# EAGLE board pwm_nmos_simple.brd (EAGLE 6.5.0)
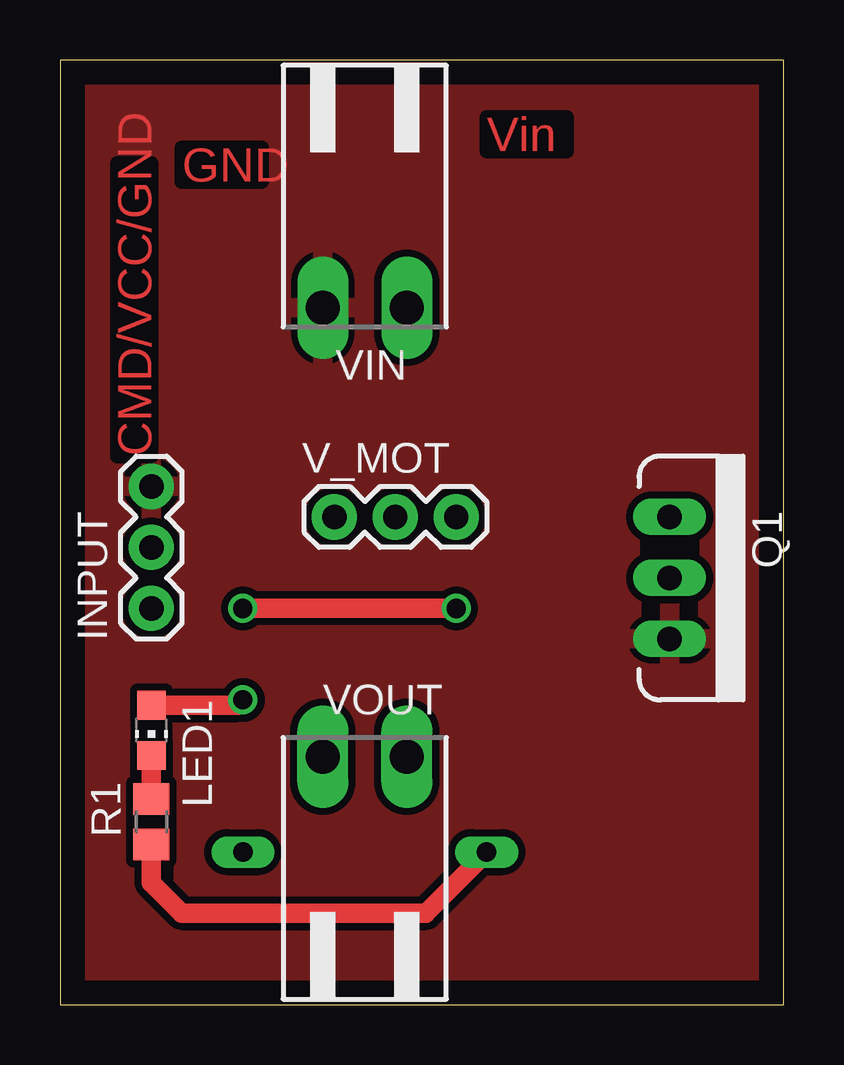
[diagram p0: board, top side]
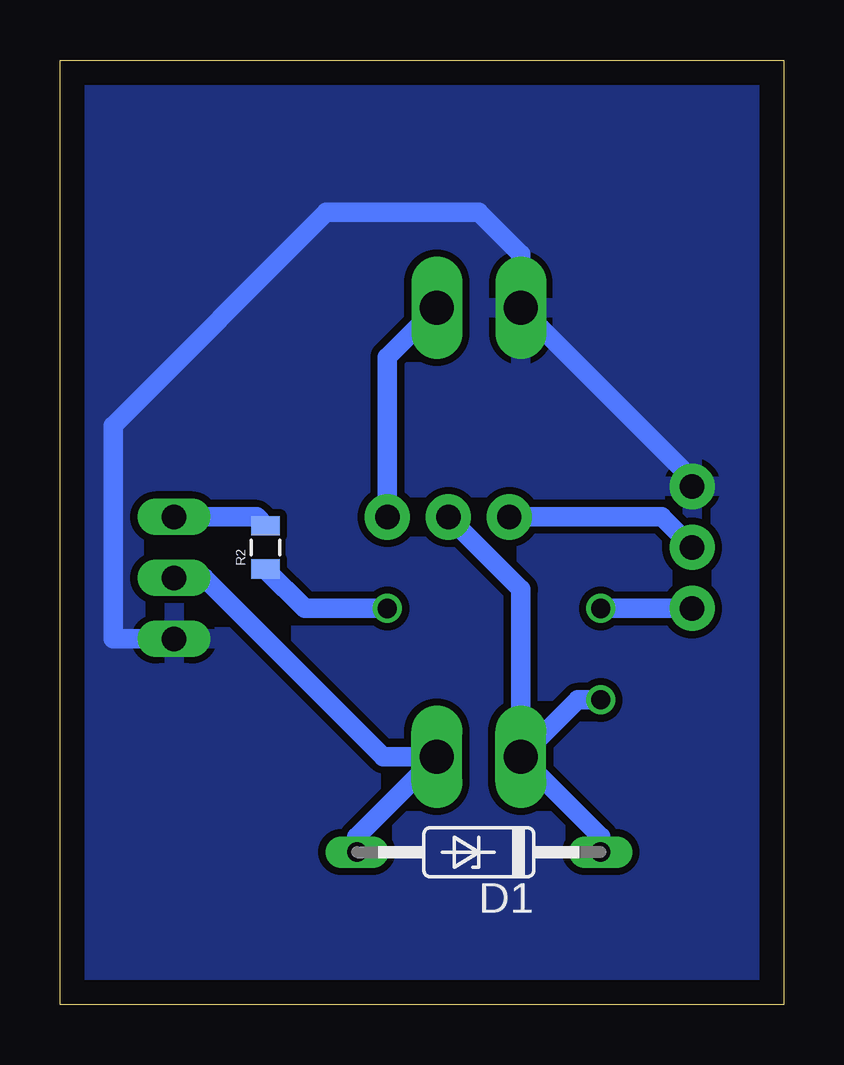
[diagram p1: board, bottom side, seen from below]

Size 30.15 x 39.36 mm. Coordinates in mm from the lower left corner, seen from the top.
Outline: 0,0 30.15,0 30.15,39.36 0,39.36 0,0
Copper layers (1*16): Top 0.035mm / dielectric 1.5mm / Bottom 0.035mm
Design rules "default": minimum track width 10mil, minimum drill 24mil, track to track 8mil, track to pad 8mil, pad to pad 8mil, via to via 8mil, smd to smd 8mil, copper to edge 40mil, drill to drill 8mil, minimum pad ring 10mil, minimum via ring 8mil, stop-mask expansion 4mil, vias tented up to drill 0mil, thermal gap 10mil
Net classes: 0 default: width 1.016 mm, drill 0.6 mm, clearance 0.3 mm

## Footprints (pad centres in the part's own frame; a part is rotated, then mirrored left to right if it is on the bottom)
DO35Z10 = drill 0.813 long: A 5.08,0; C -5.08,0
1X03 = drill 1.016 pad 1.88: 1 0,0; 2 2.54,0; 3 5.08,0
CHIP-LED0805 = smd 1.2 x 1.2: A 0,-1.05; C 0,1.05
TO220V = drill 1.016 long: 1 -2.54,0; 2 0,0; 3 2.54,0
R0805 = smd 1.3 x 1.5: 1 -0.95,0; 2 0.95,0
0805 = smd 0.8 x 1.2: 1 -0.9,0; 2 0.9,0
90-2 = drill 1.422 long: 1 -1.75,5.25; 2 1.75,5.25

## Placement (x,y rotation side)
D1  1N821  [DO35Z10]  12.7,6.35 180 bottom
INPUT  [1X03]  3.81,16.51 90 top
LED1  [CHIP-LED0805]  3.81,11.43 180 top
Q1  MOSFET-NCHANNELFQP30N06L  [TO220V]  25.4,17.78 270 top
R1  [R0805]  3.81,7.62 90 top
R2  10ohm  [0805]  21.59,19.05 90 bottom
V_MOT  [1X03]  11.43,20.32 0 top
VIN  [90-2]  12.7,34.29 180 top
VOUT  [90-2]  12.7,5.08 0 top

## Library data of the parts
D1 = diode
INPUT = SparkFun-Electromechanical
LED1 = led
Q1 = SparkFun-DiscreteSemi; PROD_ID: TRANS-10060
R1 = rcl
R2 = SparkFun-Resistors
V_MOT = SparkFun-Connectors
VIN VOUT = con-weidmueller-sl35; OC_FARNELL: unknown; OC_NEWARK: unknown

## Nets
12V: V_MOT.3 VIN.1
CMD: INPUT.1 R2.1
GND: INPUT.3 Q1.3 VIN.2
N$2: LED1.C R1.2
N$3: Q1.1 R2.2
N$5: D1.A Q1.2 R1.1 VOUT.2
V+_MOT: D1.C LED1.A V_MOT.2 VOUT.1
VCC: INPUT.2 V_MOT.1

## Tracks (layer width: path | path; a pad name or v marks a point on that pad's centre or on a via)
12V
  Bottom 0.813: VIN.1 16.51,26.98 V_MOT.3
CMD  (via drill 0.8)
  Top 0.813: v16.51,16.51 v7.62,16.51
  Bottom 0.813: R2.1 19.95,16.51 v16.51,16.51 | v7.62,16.51 INPUT.1
GND
  Bottom 0.813: Q1.3 27.94,15.24 27.94,24.13 19.05,33.02 12.7,33.02 10.95,31.27 VIN.2 3.81,21.9 INPUT.3
  pour Top: -2.54,41.91 34.29,41.91 34.29,-5.08 -2.54,-5.08
  pour Bottom: 0,40.64 31.75,40.64 31.75,-2.54 -1.27,-2.54 -1.27,40.64
N$2
  Top 0.813: LED1.C R1.2
N$3
  Bottom 0.813: R2.2 21.96,20.32 Q1.1
N$5
  Top 0.813: R1.1 3.81,5.08 5.08,3.81 15.24,3.81 D1.A
  Bottom 0.813: D1.A 17.78,7 VOUT.2 16.68,10.33 24.13,17.78 Q1.2
V+_MOT  (via drill 0.8)
  Top 0.813: LED1.A 7.4,12.48 v7.62,12.7
  Bottom 0.813: v7.62,12.7 8.58,12.7 VOUT.1 | VOUT.1 10.95,17.3 V_MOT.2 | D1.C 7.62,7 VOUT.1
VCC
  Bottom 0.813: INPUT.2 5.08,20.32 V_MOT.1

## Text on the board
Top: Vin | GND | CMD/VCC/GND